# Altium PCB BeagleBone_adapter.PcbDoc (part 2 of 2)
Units mm, origin at the board's own origin, x right, y up, seen from the top; angles counter-clockwise.
Board outline 72.96 x 54.66 mm, 2 copper layers (Top Layer, Bottom Layer), stack 1.071 mm thick; 99 components, 121 nets, 467 pads, 161 vias.
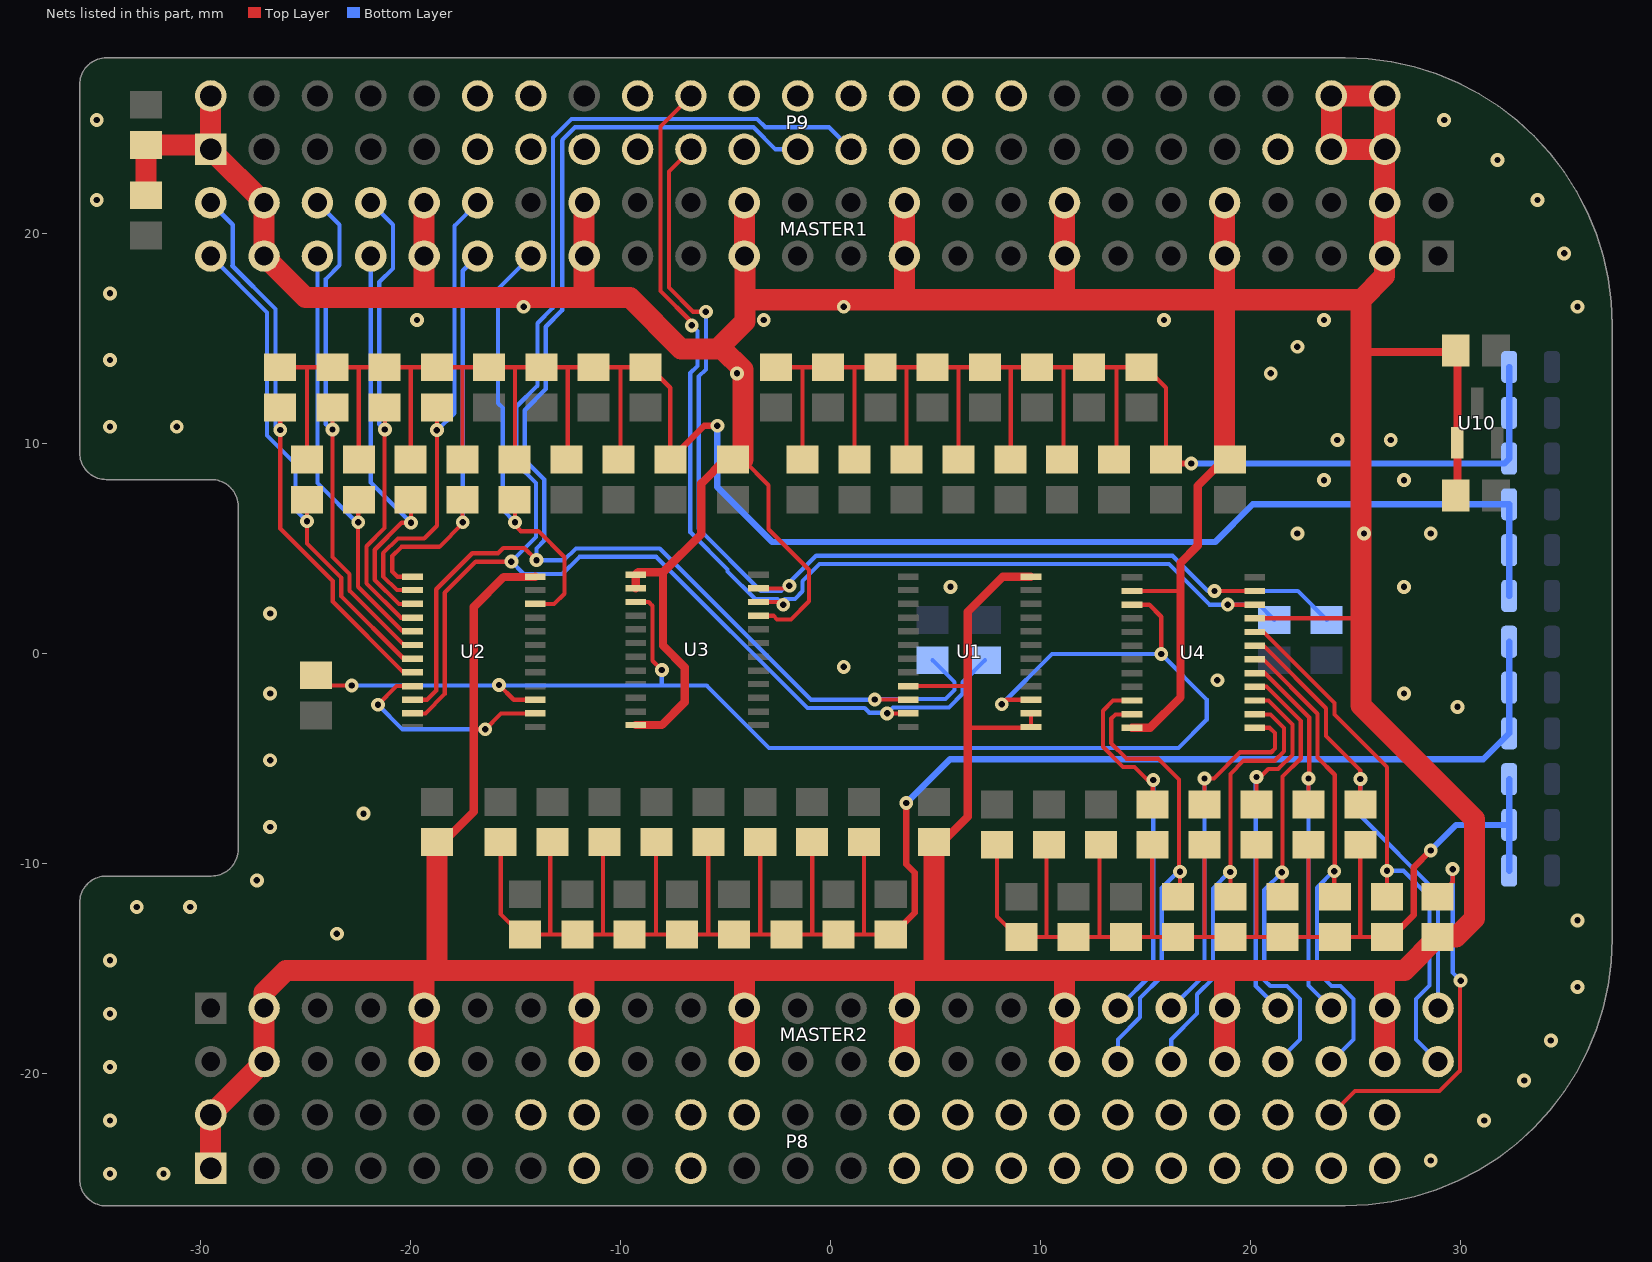
[diagram p2: the nets of this part, all layers, seen from the top]

## Via types
v1: diameter 0.66, hole 0.3, Top Layer to Bottom Layer, tented both sides, 161 vias

## Nets (pads, with @x,y where several pads share a name; then routed paths per layer and width w, separated by ;. In a path a pad name is that pad's centre, name@x,y a point inside that pad or via, vN(x,y) a via of type N, cw(c..) or ccw(c..) an arc to the next point about the centre after c; other vN are vias at no path point) (continued)
11SCL2: MASTER2.36 R520.2 U4.11 | length 23.1
  Top Layer w0.2: U4.11@14.354,-2.896 13.565,-2.896 13.366,-3.094 13.366,-4.273 14.097,-5.004 15.596,-5.004 16.586,-5.994 16.586,-10.135 16.637,-10.185 v1(16.637,-10.389) ; v1@16.485,-10.236 v1(16.637,-10.389) ; R520.2@16.55,-11.582 16.104,-11.136 16.637,-11.136 v1(16.637,-10.389)
  Bottom Layer w0.2: MASTER2.36@13.68,-19.42 13.68,-18.365 14.73,-17.315 14.73,-16.396 15.767,-15.359 15.767,-11.157 16.586,-10.338 v1(16.637,-10.389)
11SDA: MASTER1.35 R510.2 U2.10 | length 21.1
  Top Layer w0.2: v1@-15.038,6.123 -14.74,5.824 -13.906,5.824 -12.666,4.584 -12.666,2.848 -13.152,2.362 U2.10@-14.054,2.362 ; R510.2@-15.038,7.315 -15.011,7.289 v1(-15.011,6.25)
  Bottom Layer w0.2: v1(-15.011,6.25) -15.596,6.834 -15.596,11.687 -15.824,11.916 -15.824,17.356 MASTER1.35@-14.26,18.92
11SDA2: MASTER2.35 R500.2 U4.10 | length 19
  Top Layer w0.2: U4.10@14.354,-2.235 13.453,-2.235 12.966,-2.721 12.966,-4.439 13.931,-5.404 14.472,-5.404 v1@15.227,-6.159 ; R500.2@15.338,-7.188 15.338,-6.049 v1(15.367,-6.02)
  Bottom Layer w0.2: MASTER2.35@13.68,-16.88 15.367,-15.193 v1(15.367,-6.02)
12SCL: MASTER1.38 R570.2 U2.14 | length 23.2
  Top Layer w0.2: U2.14@-19.893,3.023 -20.639,3.023 -21.29,3.674 -21.29,4.777 -20.587,5.48 -19.336,5.48 -18.735,6.081 v1(-18.735,10.633) R570.2@-18.735,11.709
  Bottom Layer w0.2: v1(-18.735,10.633) -18.72,10.617 -17.901,11.436 -17.901,20.359 MASTER1.38@-16.8,21.46
12SCL2: MASTER2.38 R560.2 U4.14 | length 21.9
  Top Layer w0.2: v1(19.025,-10.403) v1@19.035,-10.414 ; R560.2@19.035,-11.582 v1@19.035,-10.414 ; U4.14@20.193,-2.896 20.939,-2.896 21.59,-3.547 21.59,-4.655 21.146,-5.099 19.666,-5.099 19.035,-5.73 v1@19.035,-10.414
  Bottom Layer w0.2: MASTER2.38@16.22,-19.42 16.22,-18.365 17.45,-17.135 17.45,-16.216 18.205,-15.46 18.205,-11.182 19.025,-10.363 v1(19.025,-10.403)
12SDA: MASTER1.37 R550.2 U2.13 | length 20.9
  Top Layer w0.2: U2.13@-19.893,3.658 -20.604,3.658 -20.858,3.912 -20.858,4.643 -20.422,5.08 -18.618,5.08 -17.509,6.189 R550.2@-17.509,7.315 -17.509,6.257 v1(-17.501,6.248)
  Bottom Layer w0.2: v1(-17.501,6.248) -17.501,18.219 MASTER1.37@-16.8,18.92
12SDA2: MASTER2.37 R540.2 U4.13 | length 18.6
  Top Layer w0.2: v1(17.805,-5.944) v1@17.809,-5.947 ; R540.2@17.809,-7.188 v1@17.809,-5.947 ; U4.13@20.193,-3.531 20.904,-3.531 21.158,-3.785 21.158,-4.521 20.98,-4.699 19.5,-4.699 18.252,-5.947 v1@17.809,-5.947
  Bottom Layer w0.2: MASTER2.37@16.22,-16.88 17.805,-15.295 v1(17.805,-5.944)
13SCL: MASTER1.42 R610.2 U2.16 | length 23.3
  Top Layer w0.2: v1@-21.221,10.668 -21.221,5.978 -22.09,5.109 -22.09,3.342 -20.45,1.702 U2.16@-19.893,1.702 ; R610.2@-21.221,11.698 R610.2@-21.221,11.709 ; v1(-21.209,10.668) R610.2@-21.209,11.698
  Bottom Layer w0.2: MASTER1.42@-21.88,21.46 -20.83,20.41 -20.83,18.328 -21.48,17.678 -21.48,10.914 -21.209,10.643 v1(-21.209,10.668)
13SCL2: MASTER2.42 R600.2 U4.16 | length 22.6
  Top Layer w0.2: U4.16@20.193,-1.575 20.75,-1.575 22.39,-3.215 22.39,-4.986 21.521,-5.856 v1@21.521,-10.446 ; v1(21.488,-10.414) v1@21.521,-10.446 ; R600.2@21.521,-11.582 v1@21.521,-10.446
  Bottom Layer w0.2: MASTER2.42@21.3,-19.42 22.35,-18.37 22.35,-16.445 21.735,-15.83 20.935,-15.83 20.644,-15.538 20.644,-11.259 v1(21.488,-10.414)
13SDA: MASTER1.41 R590.2 U2.15 | length 20.6
  Top Layer w0.2: R590.2@-19.98,7.315 -19.964,7.3 v1(-19.964,6.223) -20.41,6.223 -21.69,4.943 -21.69,3.508 -20.544,2.362 U2.15@-19.893,2.362
  Bottom Layer w0.2: MASTER1.41@-21.88,18.92 -21.88,8.139 v1(-19.964,6.223)
13SDA2: MASTER2.41 R580.2 U4.15 | length 18.8
  Top Layer w0.2: U4.15@20.193,-2.235 20.844,-2.235 21.99,-3.381 21.99,-4.821 21.312,-5.499 20.841,-5.499 v1@20.28,-6.06 ; R580.2@20.28,-7.188 v1@20.28,-6.06 ; v1(20.28,-5.878) v1@20.28,-6.06
  Bottom Layer w0.2: v1(20.28,-5.878) 20.244,-5.842 20.244,-15.824 MASTER2.41@21.3,-16.88
14SCL: MASTER1.44 R650.2 U2.18 | length 24.9
  Top Layer w0.2: R650.2@-23.706,11.709 v1@-23.706,10.668 ; v1(-23.698,10.66) v1@-23.706,10.668 ; U2.18@-19.893,0.406 -20.305,0.406 -22.89,2.992 -22.89,3.778 -23.706,4.594 v1@-23.706,10.668
  Bottom Layer w0.2: MASTER1.44@-24.42,21.46 -23.37,20.41 -23.37,18.485 -24.02,17.835 -24.02,10.914 -23.698,10.592 v1(-23.698,10.66)
14SCL2: MASTER2.44 R640.2 U4.18 | length 24.1
  Top Layer w0.2: U4.18@20.193,-0.279 20.605,-0.279 23.19,-2.865 23.19,-4.953 24.006,-5.769 v1@24.006,-10.363 ; v1(23.978,-10.363) 23.978,-11.554 R640.2@24.006,-11.582
  Bottom Layer w0.2: MASTER2.44@23.84,-19.42 24.89,-18.37 24.89,-16.445 24.275,-15.83 23.856,-15.83 23.158,-15.132 23.158,-11.151 23.997,-10.312 24.028,-10.312 v1(23.978,-10.363)
14SDA: MASTER1.43 R630.2 U2.17 | length 21.3
  Top Layer w0.2: v1@-22.49,6.248 -22.49,3.176 -20.38,1.067 U2.17@-19.893,1.067 ; v1(-22.479,6.248) -22.479,7.265 -22.49,7.276 R630.2@-22.451,7.315
  Bottom Layer w0.2: MASTER1.43@-24.42,18.92 -24.42,8.113 -22.479,6.172 v1(-22.479,6.248)
14SDA2: MASTER2.43 R620.2 U4.17 | length 19
  Top Layer w0.2: U4.17@20.193,-0.94 20.68,-0.94 22.79,-3.049 v1@22.79,-5.944 ; R620.2@22.751,-7.188 22.758,-7.181 v1(22.758,-5.944)
  Bottom Layer w0.2: v1(22.758,-5.944) 22.758,-15.798 MASTER2.43@23.84,-16.88
15SCL: MASTER1.48 R690.2 U2.20 | length 27.8
  Top Layer w0.2: v1@-26.192,10.643 -26.192,5.948 -23.69,3.446 -23.69,2.476 -20.315,-0.899 U2.20@-19.893,-0.899 ; R690.2@-26.192,11.709 -26.187,11.705 v1(-26.187,10.643)
  Bottom Layer w0.2: MASTER1.48@-29.5,21.46 -28.45,20.41 -28.45,18.485 -28.475,18.46 -26.417,16.403 -26.417,10.803 -26.187,10.573 v1(-26.187,10.643)
15SCL2: MASTER2.48 R680.2 U4.20 | length 26.5
  Top Layer w0.2: U4.20@20.193,1.026 20.615,1.026 23.99,-2.349 23.99,-2.908 26.492,-5.41 v1(26.492,-10.338) R680.2@26.492,-11.582
  Bottom Layer w0.2: v1(26.492,-10.338) 27.273,-10.338 28.52,-11.585 28.52,-15.795 27.87,-16.445 27.87,-18.37 MASTER2.48@28.92,-19.42
15SDA: MASTER1.47 R670.2 U2.19 | length 24.4
  Top Layer w0.2: v1@-24.922,6.299 -24.922,5.244 -23.29,3.612 -23.29,2.731 -20.31,-0.249 U2.19@-19.893,-0.249 ; R670.2@-24.922,7.315 -24.917,7.311 v1(-24.917,6.299)
  Bottom Layer w0.2: MASTER1.47@-29.5,18.92 -26.817,16.237 -26.817,10.382 -25.46,9.024 -25.46,6.841 v1(-24.917,6.299)
15SDA2: MASTER2.47 R660.2 U4.19 | length 22.3
  Top Layer w0.2: U4.19@20.193,0.376 20.61,0.376 23.59,-2.604 23.59,-3.93 25.222,-5.562 v1(25.222,-5.969) R660.2@25.222,-7.188
  Bottom Layer w0.2: v1(25.222,-5.969) 25.222,-7.722 28.92,-11.419 MASTER2.47@28.92,-16.88
BONE_DCAN1_RX_I2C1_SCL: P9.23 R70.1 U1.22 U2.22 | length 71.9
  Top Layer w0.2: U2.22@-19.893,-2.199 -19.198,-2.199 -18.764,-1.765 -18.764,3.061 -17.052,4.774 -15.826,4.774 -15.575,5.024 -14.575,5.024 v1(-13.995,4.445) ; v1(2.108,-2.184) 3.689,-2.184 U1.22@3.704,-2.199
  Bottom Layer w0.2: P9.23@-1.56,24 -2.615,24 -3.665,25.05 -12.155,25.05 -12.77,24.435 -12.77,16.338 -13.551,15.557 -13.551,12.585 -14.554,11.582 -14.554,9.22 -13.621,8.287 -13.621,5.377 -13.995,5.002 v1(-13.995,4.445) -12.675,4.445 -12.116,5.004 -8.128,5.004 -0.925,-2.199 2.123,-2.199 v1(2.108,-2.184) 2.127,-2.165 5.473,-2.165 5.899,-1.739 5.899,-1.363 R70.1@4.851,-0.315
BONE_DCAN1_TX_I2C1_SDA: P9.25 R80.1 U1.23 U2.23 | length 76.2
  Top Layer w0.2: U2.23@-19.893,-2.849 -19.283,-2.849 -18.364,-1.93 -18.364,2.896 -16.886,4.374 v1(-15.189,4.374) v1@-15.037,4.374 ; v1(2.696,-2.849) U1.23@3.704,-2.849
  Bottom Layer w0.2: P9.25@0.98,24 -0.07,25.05 -3.099,25.05 -3.499,25.45 -12.321,25.45 -13.21,24.561 -13.21,16.464 -13.951,15.723 -13.951,12.751 -14.954,11.748 -14.954,9.055 -14.021,8.121 -14.021,5.542 v1(-15.189,4.374) -14.6,3.785 -12.769,3.785 -11.95,4.604 -8.294,4.604 -1.091,-2.599 1.632,-2.599 1.847,-2.814 2.662,-2.814 v1(2.696,-2.849) 2.98,-2.565 5.639,-2.565 6.299,-1.905 6.299,-1.365 R80.1@7.349,-0.315
BONE_I2C1_SCL_SPI0_CS0: P9.18
BONE_I2C1_SDA_SPI0_D1: P9.17
BONE_I2C2_SCL_DCAN0_RX: P9.20 R10.1 U3.22 U4.22 | length 56.1
  Top Layer w0.2: P9.20@-6.64,26.54 -8.09,25.09 -8.09,17.253 -6.604,15.767 v1(-6.604,15.621) ; U3.22@-3.429,2.453 -2.25,2.453 v1(-2.25,2.322) ; v1(18.909,2.326) U4.22@20.193,2.326
  Bottom Layer w0.2: v1(-6.604,15.621) -6.331,15.348 -6.331,13.691 -6.674,13.348 -6.674,5.778 -4.896,4 -4.896,3.905 -3.581,2.591 -2.518,2.591 v1(-2.25,2.322) ; v1@-2.195,2.576 -2.175,2.596 -1.695,2.596 -1.326,2.965 -1.326,3.445 -0.515,4.256 16.113,4.256 18.043,2.326 v1(18.909,2.326) 20.399,2.326 R10.1@21.124,1.6
BONE_I2C2_SDA_DCAN0_TX: P9.19 R20.1 U3.23 U4.23 | length 56.2
  Top Layer w0.2: P9.19@-6.64,24 -7.69,22.95 -7.69,17.418 -6.54,16.269 v1(-5.931,16.269) ; U3.23@-3.429,3.103 -2.028,3.103 v1@-1.956,3.175 ; v1(18.284,2.976) U4.23@20.193,2.976
  Bottom Layer w0.2: v1(-5.931,16.269) -5.931,13.525 -6.274,13.183 -6.274,5.944 -3.321,2.991 -2.345,2.991 -0.68,4.656 16.279,4.656 17.959,2.976 v1(18.284,2.976) 22.246,2.976 R20.1@23.622,1.6
  other v1: -1.956,3.226
BONE_SPI1_CLK: P9.32
BONE_SPI1_CS0: P9.27
BONE_SPI1_CS1: P9.41
BONE_SPI1_D0: P9.30
BONE_SPI1_D1: P9.29
BONE_STROBE: P9.28
BONE_UART2_RXD_SPI0_CLK: P9.21
BONE_UART2_TXD_SPI0_D0: P9.22
BONE_UART4_RXD: P9.12
BONE_UART4_TXD: P9.14
EHRPWM1A: P9.13
EHRPWM1B: P9.15
EHRPWM2A: P8.20
EHRPWM2B: P8.14
GND: C10.2 C20.2 C30.2 C40.2 C50.2 C60.2 C70.2 C80.2 MASTER1.3 MASTER1.4 MASTER1.9 MASTER1.10 MASTER1.15 MASTER1.16 MASTER1.21 MASTER1.22 MASTER1.27 MASTER1.28 MASTER1.33 MASTER1.34 MASTER1.39 MASTER1.40 MASTER1.45 MASTER1.46 MASTER2.3 MASTER2.4 MASTER2.9 MASTER2.10 MASTER2.15 MASTER2.16 MASTER2.21 MASTER2.22 MASTER2.27 MASTER2.28 MASTER2.33 MASTER2.34 MASTER2.39 MASTER2.40 MASTER2.45 MASTER2.46 P8.1 P8.2 P9.1 P9.2 P9.43 P9.44 P9.45 P9.46 R130.2 U1.1 U1.2 U1.12 U1.21 U2.2 U2.12 U2.21 U3.1 U3.2 U3.12 U3.21 U4.2 U4.12 U4.21 U10.1 | length 383.1
  Top Layer w0.2: v1(-21.539,-2.438) -20.65,-1.549 U2.21@-19.893,-1.549 ; -16.974,-3.607 v1(-16.434,-3.607) -15.676,-2.849 U2.2@-14.054,-2.849 ; C10.2@-4.166,9.23 -2.946,8.011 -2.946,5.918 -1.016,3.988 -1.016,2.489 -1.88,1.626 -2.54,1.626 -2.717,1.803 U3.21@-3.429,1.803 ; U1.21@3.704,-1.549 6.527,-1.549 ; 6.528,-3.531 9.511,-3.531 U1.1@9.542,-3.499 U1.2@9.542,-2.849 ; U4.2@14.354,2.976 16.582,2.976 16.662,2.896 ; U4.21@20.193,1.676 25.121,1.676 25.248,1.549
  Top Layer w0.4: C60.2@-18.72,-8.976 -18.425,-8.976 -16.974,-7.525 -16.974,-3.607 -16.974,2.229 -15.559,3.644 -14.068,3.644 U2.12@-14.054,3.658 ; U3.12@-9.268,-3.404 -8.026,-3.404 -6.934,-2.311 -6.934,-0.66 -7.969,0.374 -7.969,3.867 ; U3.2@-9.268,3.103 U3.1@-9.268,3.753 -9.153,3.867 -7.969,3.867 ; C10.2@-4.648,9.23 -5.019,9.23 -6.147,8.103 -6.147,5.69 -7.969,3.867 ; C20.2@4.928,-8.976 5.324,-8.976 6.528,-7.772 6.528,-3.531 6.528,1.981 8.204,3.658 U1.12@9.542,3.658 ; U4.12@14.354,-3.531 15.215,-3.531 16.662,-2.083 16.662,2.896 16.662,4.318 17.475,5.131 17.475,7.976 C50.2@18.877,9.378 ; 25.248,14.453 25.349,14.351 29.845,14.351 C70.2@29.845,7.518
  Top Layer w1: C40.2@-32.588,21.819 C30.2@-32.588,24.206 -29.706,24.206 P9.1@-29.5,24 ; P8.1@-29.5,-24.5 P8.2@-29.5,-21.96 MASTER2.4@-26.96,-19.42 MASTER2.3@-26.96,-16.88 -26.96,-16.14 -25.908,-15.088 -11.633,-15.088 ; P9.2@-29.5,26.54 P9.1@-29.5,24 ; MASTER2.10@-19.34,-19.42 MASTER2.9@-19.34,-16.88 -19.34,-15.149 ; -19.34,16.957 MASTER1.39@-19.34,18.92 MASTER1.40@-19.34,21.46 ; -18.72,-14.529 C60.2@-18.72,-8.976 ; MASTER2.16@-11.72,-19.42 MASTER2.15@-11.72,-16.88 -11.72,-15.174 -11.633,-15.088 ; -11.72,17.033 MASTER1.33@-11.72,18.92 MASTER1.34@-11.72,21.46 ; -5.385,14.503 -4.075,15.813 -4.075,16.84 ; C10.2@-4.648,9.23 -4.166,9.23 -4.166,13.513 -5.156,14.503 -7.112,14.503 -9.55,16.942 -24.982,16.942 MASTER1.45@-26.96,18.92 MASTER1.46@-26.96,21.46 P9.1@-29.5,24 ; MASTER2.22@-4.1,-19.42 MASTER2.21@-4.1,-16.88 -4.1,-15.179 -4.191,-15.088 ; MASTER1.28@-4.1,21.46 MASTER1.27@-4.1,18.92 -4.075,18.895 -4.075,16.84 ; MASTER2.28@3.52,-19.42 MASTER2.27@3.52,-16.88 3.52,-15.225 ; MASTER1.22@3.52,21.46 MASTER1.21@3.52,18.92 3.52,16.876 3.556,16.84 ; 4.928,-15.062 C20.2@4.928,-8.976 ; MASTER2.34@11.14,-19.42 MASTER2.33@11.14,-16.88 11.14,-15.098 11.151,-15.088 ; MASTER1.16@11.14,21.46 MASTER1.15@11.14,18.92 11.14,16.851 11.151,16.84 ; MASTER2.40@18.76,-19.42 MASTER2.39@18.76,-16.88 18.76,-15.124 18.796,-15.088 ; C50.2@18.76,9.495 18.76,16.84 ; MASTER1.10@18.76,21.46 MASTER1.9@18.76,18.92 18.76,16.84 ; C50.2@18.877,9.378 C50.2@19.025,9.23 ; P9.43@23.84,24 P9.43@23.851,24 ; MASTER2.46@26.38,-19.42 MASTER2.45@26.38,-16.88 26.38,-15.229 26.238,-15.088 ; -11.633,-15.088 -4.191,-15.088 ; -4.191,-15.088 11.151,-15.088 ; -4.075,16.84 3.556,16.84 ; 3.556,16.84 11.151,16.84 ; 11.151,-15.088 18.796,-15.088 ; 11.151,16.84 18.76,16.84 ; 18.76,16.84 25.248,16.84 ; 18.796,-15.088 26.238,-15.088 ; P9.43@23.851,24 23.851,26.529 P9.44@23.84,26.54 P9.46@26.38,26.54 P9.45@26.38,24 ; P9.43@23.851,24 P9.45@26.38,24 ; 25.248,16.84 26.38,17.973 MASTER1.3@26.38,18.92 MASTER1.4@26.38,21.46 P9.45@26.38,24 ; 25.248,16.84 25.248,14.453 25.248,1.549 25.248,-2.464 30.658,-7.874 30.658,-12.624 29.784,-13.498 R130.2@28.905,-13.498 27.315,-15.088 26.238,-15.088
  Bottom Layer w0.2: v1(-21.539,-2.438) -20.371,-3.607 v1(-16.434,-3.607)
  other v1: -34.29,-24.765 -31.75,-24.765 28.575,-24.13 -34.29,-22.225 31.115,-22.225 33.02,-20.32 -34.29,-19.685 34.29,-18.415 -34.29,-17.145 35.56,-15.875 -34.29,-14.605 -23.495,-13.335 35.56,-12.7 -33.02,-12.065 -30.48,-12.065 -27.305,-10.795 -26.67,-8.255 -22.225,-7.62 -26.67,-5.08 29.845,-2.54 -26.67,-1.905 27.305,-1.905 18.415,-1.27 0.635,-0.635 -26.67,1.905 5.715,3.175 27.305,3.175 22.225,5.715 25.4,5.715 28.575,5.715 23.495,8.255 27.305,8.255 24.13,10.16 26.67,10.16 -34.29,10.795 -31.115,10.795 -4.445,13.335 20.955,13.335 -34.29,13.97 22.225,14.605 -19.685,15.875 -3.175,15.875 15.875,15.875 23.495,15.875 -14.605,16.51 0.635,16.51 35.56,16.51 -34.29,17.145 34.925,19.05 -34.925,21.59 33.655,21.59 31.75,23.495 -34.925,25.4 29.21,25.4
GPIO1_28: P9.11
LCD_AC_BIAS_EN: P8.29
LCD_DATA0: P8.46
LCD_DATA1: P8.45
LCD_DATA2: P8.44 R130.1 | length 18.4
  Top Layer w0.2: P8.44@23.84,-21.96 24.972,-20.828 28.997,-20.828 29.97,-19.855 29.97,-15.598 v1(29.997,-15.57) ; R130.1@28.905,-11.582 29.616,-10.871 v1(29.616,-10.262)
  Bottom Layer w0.2: v1(29.616,-10.262) 29.616,-15.189 v1(29.997,-15.57)
LCD_DATA3: P8.43
LCD_DATA4: P8.42
LCD_DATA5: P8.41
LCD_DATA6: P8.40
LCD_DATA7: P8.39
LCD_DATA8_XRES: P8.38
LCD_DATA9_A0: P8.37
LCD_DATA10_XRD: P8.35
LCD_DATA11_XWR: P8.33
LCD_DATA12_XCS: P8.36
LCD_DATA13_3V3ON: P8.34
LCD_DATA14_5VON: P8.32
LCD_DATA15: P8.31
LCD_DATA16: P8.16
LCD_DATA17: P8.15
LCD_HSYNC: P8.30
LCD_PCLK: P8.27
LCD_VSYNC: P8.28
POWER_RELAY_SIGNAL: P9.24
PR1_PRU1_PRU_R31_12: P8.22
PR1_PRU1_PRU_R31_13: P8.19
SPI1_CLK_ENABLE: P9.26
TCA_RESET: R700.1 U1.3 U2.3 U3.3 U4.3 | length 68.9
  Top Layer w0.2: R700.1@-24.486,-1.031 -23.993,-1.524 v1(-22.784,-1.524) ; v1(-15.773,-1.499) -15.073,-2.199 U2.3@-14.054,-2.199 ; U3.3@-9.268,2.453 -8.65,2.453 -8.469,2.271 -8.469,-0.345 v1(-8.026,-0.787) ; v1(8.153,-2.413) 8.368,-2.199 U1.3@9.542,-2.199 ; U4.3@14.354,2.326 15.175,2.326 15.748,1.753 v1(15.748,-0.025)
  Bottom Layer w0.2: v1(-22.784,-1.524) -8.026,-1.524 ; v1(-15.773,-1.499) v1@-15.773,-1.372 ; v1(-8.026,-0.787) -8.026,-1.524 ; v1(8.153,-2.413) 10.541,-0.025 v1(15.748,-0.025) 17.907,-2.184 17.907,-3.15 16.561,-4.496 -2.921,-4.496 -5.893,-1.524 -8.026,-1.524
VCC_I2C1: A100.2 A110.2 A120.2 R40.1 R60.1 R100.1 R120.1 R150.1 R170.1 R190.1 R210.1 R230.1 R250.1 R270.1 R290.1 R310.1 R330.1 R350.1 R370.1 | length 74.1
  Top Layer w0.2: R370.1@-2.595,13.625 -1.326,13.625 R330.1@-0.11,13.625 R290.1@2.376,13.625 3.704,13.625 ; R350.1@-1.325,9.23 -1.325,13.624 ; 1.138,13.619 1.146,13.612 R310.1@1.146,9.23 ; R270.1@3.617,9.23 3.617,13.538 3.704,13.625 ; R230.1@6.088,9.23 6.088,13.596 6.117,13.625 ; R190.1@8.584,9.23 8.584,13.625 ; R150.1@11.03,9.23 11.095,9.296 11.095,13.625 ; R100.1@13.501,9.23 13.61,9.339 13.61,13.625 ; R40.1@15.972,9.23 15.972,12.649 14.996,13.625 13.61,13.625 ; 3.704,13.625 R250.1@4.861,13.625 6.117,13.625 ; 6.117,13.625 R210.1@7.347,13.625 8.584,13.625 ; 8.584,13.625 R170.1@9.832,13.625 11.095,13.625 ; 11.095,13.625 13.61,13.625
  Top Layer w0.3: R40.1@15.972,9.23 16.16,9.042 v1(17.17,9.042)
  Bottom Layer w0.3: v1(17.17,9.042) 32.071,9.042 A120.2@32.309,9.28 A110.2@32.309,11.46 A100.2@32.309,13.64
VCC_I2C2: A70.2 A80.2 A90.2 R390.1 R410.1 R430.1 R450.1 R470.1 R490.1 R510.1 R530.1 R550.1 R570.1 R590.1 R610.1 R630.1 R650.1 R670.1 R690.1 | length 103
  Top Layer w0.2: R690.1@-26.192,13.625 -24.922,13.625 R650.1@-23.706,13.625 R610.1@-21.221,13.625 -19.893,13.625 ; R670.1@-24.922,9.23 -24.922,13.624 ; -22.458,13.619 -22.451,13.612 R630.1@-22.451,9.23 ; R590.1@-19.98,9.23 -19.98,13.538 -19.893,13.625 ; R550.1@-17.509,9.23 -17.509,13.596 -17.48,13.625 ; R510.1@-15.013,9.23 -15.013,13.625 ; R470.1@-12.567,9.23 -12.502,9.296 -12.502,13.625 ; R430.1@-10.096,9.23 -9.987,9.339 -9.987,13.625 ; R390.1@-7.625,9.23 -7.625,12.649 -8.6,13.625 -9.987,13.625 ; -19.893,13.625 R570.1@-18.735,13.625 -17.48,13.625 ; -17.48,13.625 R530.1@-16.25,13.625 -15.013,13.625 ; -15.013,13.625 R490.1@-13.764,13.625 -12.502,13.625 ; -12.502,13.625 -9.987,13.625
  Top Layer w0.3: R390.1@-7.625,9.23 -6.009,10.846 v1(-5.385,10.846)
  Bottom Layer w0.3: v1(-5.385,10.846) -5.385,7.925 -2.769,5.309 18.313,5.309 20.105,7.1 A70.2@32.309,7.1 A80.2@32.309,4.921 A90.2@32.309,2.741
VCC_I2C3: A40.2 A50.2 A60.2 R30.1 R50.1 R90.1 R110.1 R140.1 R160.1 R180.1 R200.1 R220.1 R240.1 R260.1 R280.1 R300.1 R320.1 R340.1 R360.1 | length 94.7
  Top Layer w0.2: R30.1@-15.697,-8.976 -15.697,-12.395 -14.722,-13.371 -13.335,-13.371 ; R90.1@-13.226,-8.976 -13.335,-9.085 -13.335,-13.371 ; R140.1@-10.755,-8.976 -10.82,-9.042 -10.82,-13.371 ; R180.1@-8.309,-8.976 -8.309,-13.371 ; R220.1@-5.813,-8.976 -5.813,-13.342 -5.842,-13.371 ; R260.1@-3.342,-8.976 -3.342,-13.284 -3.429,-13.371 ; R300.1@-0.871,-8.976 -0.871,-13.358 -0.864,-13.365 ; 1.6,-13.37 R340.1@1.6,-8.976 ; R360.1@2.87,-13.371 1.6,-13.371 R320.1@0.384,-13.371 R280.1@-2.101,-13.371 -3.429,-13.371 ; -13.335,-13.371 -10.82,-13.371 ; -10.82,-13.371 R160.1@-9.558,-13.371 -8.309,-13.371 ; -8.309,-13.371 R200.1@-7.072,-13.371 -5.842,-13.371 ; -5.842,-13.371 R240.1@-4.587,-13.371 -3.429,-13.371
  Top Layer w0.3: R360.1@2.87,-13.371 2.987,-13.371 4.013,-12.344 4.013,-10.439 3.607,-10.033 v1(3.607,-7.112)
  Bottom Layer w0.3: v1(3.607,-7.112) 5.69,-5.029 31.078,-5.029 A60.2@32.309,-3.798 A50.2@32.309,-1.619 A40.2@32.309,0.561
VCC_I2C4: A10.2 A20.2 A30.2 R380.1 R400.1 R420.1 R440.1 R460.1 R480.1 R500.1 R520.1 R540.1 R560.1 R580.1 R600.1 R620.1 R640.1 R660.1 R680.1 | length 67
  Top Layer w0.2: R380.1@7.925,-9.103 7.925,-12.522 8.9,-13.498 10.287,-13.498 ; R420.1@10.396,-9.103 10.287,-9.212 10.287,-13.498 ; R460.1@12.867,-9.103 12.802,-9.169 12.802,-13.498 ; R500.1@15.313,-9.103 15.313,-13.498 ; R540.1@17.809,-9.103 17.809,-13.469 17.78,-13.498 ; R580.1@20.28,-9.103 20.28,-13.411 20.193,-13.498 ; R620.1@22.751,-9.103 22.751,-13.485 22.758,-13.492 ; 25.222,-13.497 R660.1@25.222,-9.103 ; R680.1@26.492,-13.498 25.222,-13.498 R640.1@24.006,-13.498 R600.1@21.521,-13.498 20.193,-13.498 ; 10.287,-13.498 12.802,-13.498 ; 12.802,-13.498 R480.1@14.064,-13.498 15.313,-13.498 ; 15.313,-13.498 R520.1@16.55,-13.498 17.78,-13.498 ; 17.78,-13.498 R560.1@19.035,-13.498 20.193,-13.498
  Top Layer w0.3: R680.1@26.492,-13.498 26.711,-13.498 27.762,-12.446 27.762,-10.185 v1(28.575,-9.373)
  Bottom Layer w0.3: v1(28.575,-9.373) 29.79,-8.158 A20.2@32.309,-8.158 ; A30.2@32.309,-10.338 A20.2@32.309,-8.158 ; A10.2@32.309,-5.978 A20.2@32.309,-8.158
pads on no net: P8.3 P8.4 P8.5 P8.6 P8.7 P8.8 P8.9 P8.10 P8.11 P8.12 P8.13 P8.17 P8.18 P8.21 P8.23 P8.24 P8.25 P8.26 P9.9 P9.10 P9.16 P9.31 P9.33 P9.34 P9.35 P9.36 P9.37 P9.38 P9.39 P9.40 P9.42

## Polygon pours and split planes (outlines as drawn)
GND on Top Layer "Top Layer-No Net" (solid, remove dead copper, pour order 2): -36.932,30.632 34.265,30.632 40.157,24.74 40.157,-20.777 33.249,-27.686 32.639,-28.296 -29.616,-28.296 -34.823,-28.296 -41.25,-21.869 -40.869,-21.488 -40.869,20.879
GND on Bottom Layer "Top Layer-No Net" (solid, remove dead copper, pour order 4): -36.144,30.937 32.563,30.937 39.624,23.876 39.624,-22.631 36.068,-26.187 32.69,-29.566 -30.251,-29.566 -35.204,-29.566 -41.885,-22.885 -41.961,-22.809 -41.961,22.301

## Keep-outs
Keep-Out Layer:
  the board outline again, w0.254
Mechanical 1:
  the board outline again, w0.254

## Silkscreen, mask and mechanical layers (free items; w line width, h text height)
Bottom Overlay:
  lines w0.127: -26.487,1.838 cw(c-26.432,1.87) -26.377,1.902 ; -26.487,1.901 ccw(c-26.432,1.87) -26.377,1.838 ; -26.037,1.838 cw(c-25.982,1.87) -25.927,1.902 ; -26.037,1.902 ccw(c-25.982,1.87) -25.927,1.839 ; -25.637,2.602 cw(c-25.582,2.57) -25.527,2.539 ; -25.582,2.507 cw(c-25.582,2.57) -25.582,2.634 ; -25.286,3.254 ccw(c-25.232,3.22) -25.179,3.186 ; -25.232,3.157 cw(c-25.232,3.22) -25.232,3.284 ; -24.936,3.804 cw(c-24.882,3.77) -24.829,3.736 ; -24.893,2.589 ccw(c-24.832,2.57) -24.771,2.552 ; -24.882,3.707 cw(c-24.882,3.77) -24.882,3.834 ; -24.832,2.507 ccw(c-24.832,2.57) -24.832,2.634 ; -24.737,4.152 ccw(c-24.682,4.12) -24.628,4.088 ; -24.693,3.239 cw(c-24.632,3.22) -24.572,3.202 ; -24.682,4.057 cw(c-24.682,4.12) -24.682,4.184 ; -24.632,3.157 ccw(c-24.632,3.22) -24.632,3.284 ; -24.543,3.788 ccw(c-24.482,3.77) -24.421,3.753 ; -24.482,3.707 ccw(c-24.482,3.77) -24.482,3.834 ; -24.443,4.138 cw(c-24.382,4.12) -24.321,4.103 ; -24.382,4.057 ccw(c-24.382,4.12) -24.382,4.184 ; -24.288,5.752 cw(c-24.233,5.72) -24.177,5.689 ; -24.287,-1.962 ccw(c-24.232,-1.93) -24.177,-1.898 ; -24.233,5.657 cw(c-24.233,5.72) -24.233,5.784 ; -24.232,-1.993 cw(c-24.232,-1.93) -24.232,-1.866 ; -24.087,-1.561 ccw(c-24.032,-1.53) -23.977,-1.498 ; -24.044,-1.467 ccw(c-23.982,-1.48) -23.919,-1.492 ; -24.037,5.352 cw(c-23.983,5.32) -23.928,5.288 ; -24.032,-1.593 cw(c-24.032,-1.53) -24.032,-1.466 ; -23.983,5.257 cw(c-23.983,5.32) -23.983,5.384 ; -23.088,-1.501 ccw(c-23.032,-1.53) -22.975,-1.558 ; -23.032,-1.593 ccw(c-23.032,-1.53) -23.032,-1.466 ; -22.938,-1.201 cw(c-22.882,-1.23) -22.825,-1.258 ; -22.882,-1.293 cw(c-22.882,-1.23) -22.882,-1.166 ; -22.695,5.333 cw(c-22.633,5.32) -22.57,5.308 ; -22.294,2.585 ccw(c-22.232,2.571) -22.17,2.556 ; -22.232,2.507 cw(c-22.232,2.571) -22.232,2.634 ; -22.144,3.235 cw(c-22.082,3.221) -22.02,3.206 ; -22.082,3.157 cw(c-22.082,3.221) -22.082,3.284 ; -21.995,3.211 cw(c-21.932,3.221) -21.869,3.23 ; -21.932,3.157 ccw(c-21.932,3.221) -21.932,3.284 ; -21.895,2.561 ccw(c-21.832,2.571) -21.769,2.58 ; -21.832,2.507 ccw(c-21.832,2.571) -21.832,2.634 ; -21.495,5.308 cw(c-21.433,5.321) -21.37,5.333 ; -21.238,-1.258 cw(c-21.182,-1.229) -21.125,-1.201 ; -21.182,-1.293 ccw(c-21.182,-1.229) -21.182,-1.166 ; -21.088,-1.558 ccw(c-21.032,-1.529) -20.975,-1.501 ; -21.032,-1.593 cw(c-21.032,-1.529) -21.032,-1.466 ; -20.137,5.289 cw(c-20.083,5.321) -20.028,5.353 ; -20.094,-1.542 ccw(c-20.032,-1.529) -19.969,-1.516 ; -20.087,-1.498 ccw(c-20.032,-1.529) -19.976,-1.561 ; -20.083,5.257 ccw(c-20.083,5.321) -20.083,5.384 ; -20.032,-1.593 ccw(c-20.032,-1.529) -20.032,-1.466 ; -19.888,5.689 cw(c-19.833,5.721) -19.778,5.753 ; -19.887,-1.898 ccw(c-19.832,-1.929) -19.776,-1.961 ; -19.833,5.657 ccw(c-19.833,5.721) -19.833,5.784 ; -19.832,-1.993 ccw(c-19.832,-1.929) -19.832,-1.866 ; -19.745,4.109 cw(c-19.682,4.121) -19.62,4.133 ; -19.682,4.057 cw(c-19.682,4.121) -19.682,4.184 ; -19.444,2.559 ccw(c-19.382,2.571) -19.32,2.583 ; -19.437,4.089 ccw(c-19.382,4.121) -19.328,4.153 ; -19.382,2.507 cw(c-19.382,2.571) -19.382,2.634 ; -19.382,4.057 ccw(c-19.382,4.121) -19.382,4.184 ; -18.537,2.54 cw(c-18.482,2.571) -18.427,2.603 ; -18.482,2.508 ccw(c-18.482,2.571) -18.482,2.635 ; -18.137,1.84 ccw(c-18.082,1.871) -18.027,1.903 ; -18.137,1.903 cw(c-18.082,1.871) -18.027,1.84 ; -17.687,1.889 ccw(c-17.632,1.921) -17.577,1.953 ; -17.687,1.953 cw(c-17.632,1.921) -17.577,1.89 ; -20.982,-1.593 cw(c-20.982,-1.529) -20.982,-1.466 cw(c-20.982,-1.529) -20.982,-1.593
  lines w0.254: -23.982,-1.48 -22.633,5.32 ; -21.433,5.321 -20.032,-1.529 ; 29.997,-4.928 36.906,-4.928 ; 29.997,1.702 36.906,1.702 ; 29.997,8.204 36.906,8.204 ; 30.531,14.681 36.906,14.681 ; 30.709,-11.405 36.881,-11.405 ; -20.032,-1.529 -18.082,1.871 -18.482,2.571 -19.382,2.571 -19.682,4.121 -19.382,4.121 -20.083,5.321 -23.983,5.32 -24.682,4.12 -24.382,4.12 -24.482,3.77 -24.882,3.77 -25.232,3.22 -24.632,3.22 -24.832,2.57 -25.582,2.57 -25.982,1.87 -24.032,-1.53 -23.032,-1.53 -22.882,-1.23 -21.182,-1.229 -21.032,-1.529 -20.982,-1.529 -20.032,-1.529 ; -26.432,1.87 -24.232,-1.93 -19.832,-1.929 -17.632,1.921 -19.833,5.721 -24.233,5.72 -26.432,1.87 ; -22.232,2.571 -21.832,2.571 -21.932,3.221 -22.082,3.221 -22.232,2.571
  text "SCL" at -31.826,20.98 h1.15
  text "SDA" at -31.725,18.313 h1.15
  text "5V" at 34.163,15.164 h1
  text "I2C0" at 28.321,13.106 h1.15 r270
  text "I2C15" at -30.099,11.887 h1.15 r270
  text "GND" at -27.559,11.887 h1.15 r270
  text "I2C14" at -25.019,11.887 h1.15 r270
  text "I2C13" at -22.479,11.887 h1.15 r270
  text "GND" at -19.939,11.887 h1.15 r270
  text "I2C12" at -17.399,11.887 h1.15 r270
  text "I2C11" at -14.859,11.887 h1.15 r270
  text "GND" at -12.319,11.887 h1.15 r270
  text "I2C10" at -9.779,11.887 h1.15 r270
  text "I2C9" at -7.239,11.887 h1.15 r270
  text "GND" at -4.699,11.887 h1.15 r270
  text "I2C8" at -2.159,11.887 h1.15 r270
  text "I2C7" at 0.381,11.887 h1.15 r270
  text "GND" at 2.921,11.887 h1.15 r270
  text "I2C6" at 5.461,11.887 h1.15 r270
  text "I2C5" at 8.001,11.887 h1.15 r270
  text "GND" at 10.541,11.887 h1.15 r270
  text "I2C4" at 13.081,11.887 h1.15 r270
  text "I2C3" at 15.621,11.887 h1.15 r270
  text "GND" at 18.161,11.887 h1.15 r270
  text "I2C2" at 20.701,11.887 h1.15 r270
  text "I2C1" at 23.241,11.887 h1.15 r270
  text "GND" at 25.781,11.887 h1.15 r270
  text "3V3" at 31.115,10.998 h1
  text "0..7" at 35.433,9.906 h1 r270
  text "1V8" at 31.115,8.819 h1
  text "5V" at 31.115,6.641 h1
  text "FE00100" at 1.905,6.35 h3
  text "3V3" at 31.115,4.462 h1
  text "8..15" at 35.433,2.819 h1 r270
  text "1V8" at 31.115,2.283 h1
  text "ADDRESS" at -0.635,1.27 h2
  text "5V" at 31.115,0.104 h1
  text "0x70/0x71" at 0.635,-1.905 h2
  text "3V3" at 31.115,-2.074 h1
  text "16..23" at 35.433,-4.191 h1 r270
  text "1V8" at 31.115,-4.253 h1
  text "5V" at 31.115,-6.432 h1
  text "32 I2C channels MUX" at 26.67,-6.985 h2.8
  text "3V3" at 31.115,-8.611 h1
  text "GND" at -26.441,-9.449 h1.15 r90
  text "I2C17" at -23.901,-9.449 h1.15 r90
  text "I2C18" at -21.361,-9.449 h1.15 r90
  text "GND" at -18.821,-9.449 h1.15 r90
  text "I2C19" at -16.281,-9.449 h1.15 r90
  text "I2C20" at -13.741,-9.449 h1.15 r90
  text "GND" at -11.201,-9.449 h1.15 r90
  text "I2C21" at -8.661,-9.449 h1.15 r90
  text "I2C22" at -6.121,-9.449 h1.15 r90
  text "GND" at -3.581,-9.449 h1.15 r90
  text "I2C23" at -1.041,-9.449 h1.15 r90
  text "I2C24" at 1.499,-9.449 h1.15 r90
  text "GND" at 4.039,-9.449 h1.15 r90
  text "I2C25" at 6.579,-9.449 h1.15 r90
  text "I2C26" at 9.119,-9.449 h1.15 r90
  text "GND" at 11.659,-9.449 h1.15 r90
  text "I2C27" at 14.199,-9.449 h1.15 r90
  text "I2C28" at 16.739,-9.449 h1.15 r90
  text "GND" at 19.279,-9.449 h1.15 r90
  text "I2C29" at 21.819,-9.449 h1.15 r90
  text "I2C30" at 24.359,-9.449 h1.15 r90
  text "GND" at 26.899,-9.449 h1.15 r90
  text "I2C31" at 29.439,-9.652 h1.15 r90
  text "24..31" at 35.433,-10.693 h1 r270
  text "I2C16" at -28.956,-11.176 h0.9 r90
  text "1V8" at 34.62,-13.081 h1
  text "SDA" at -31.775,-17.501 h1.15
  text "SCL" at -31.801,-20.066 h1.15